# Altium PCB PCB2.FINAL.PcbDoc (part 2 of 2)
Units mm, origin at the board's own origin, x right, y up, seen from the top; angles counter-clockwise.
Board outline 120.4 x 83.82 mm, 2 copper layers (Top Layer, Bottom Layer); 48 components, 74 nets, 339 pads, 24 vias.
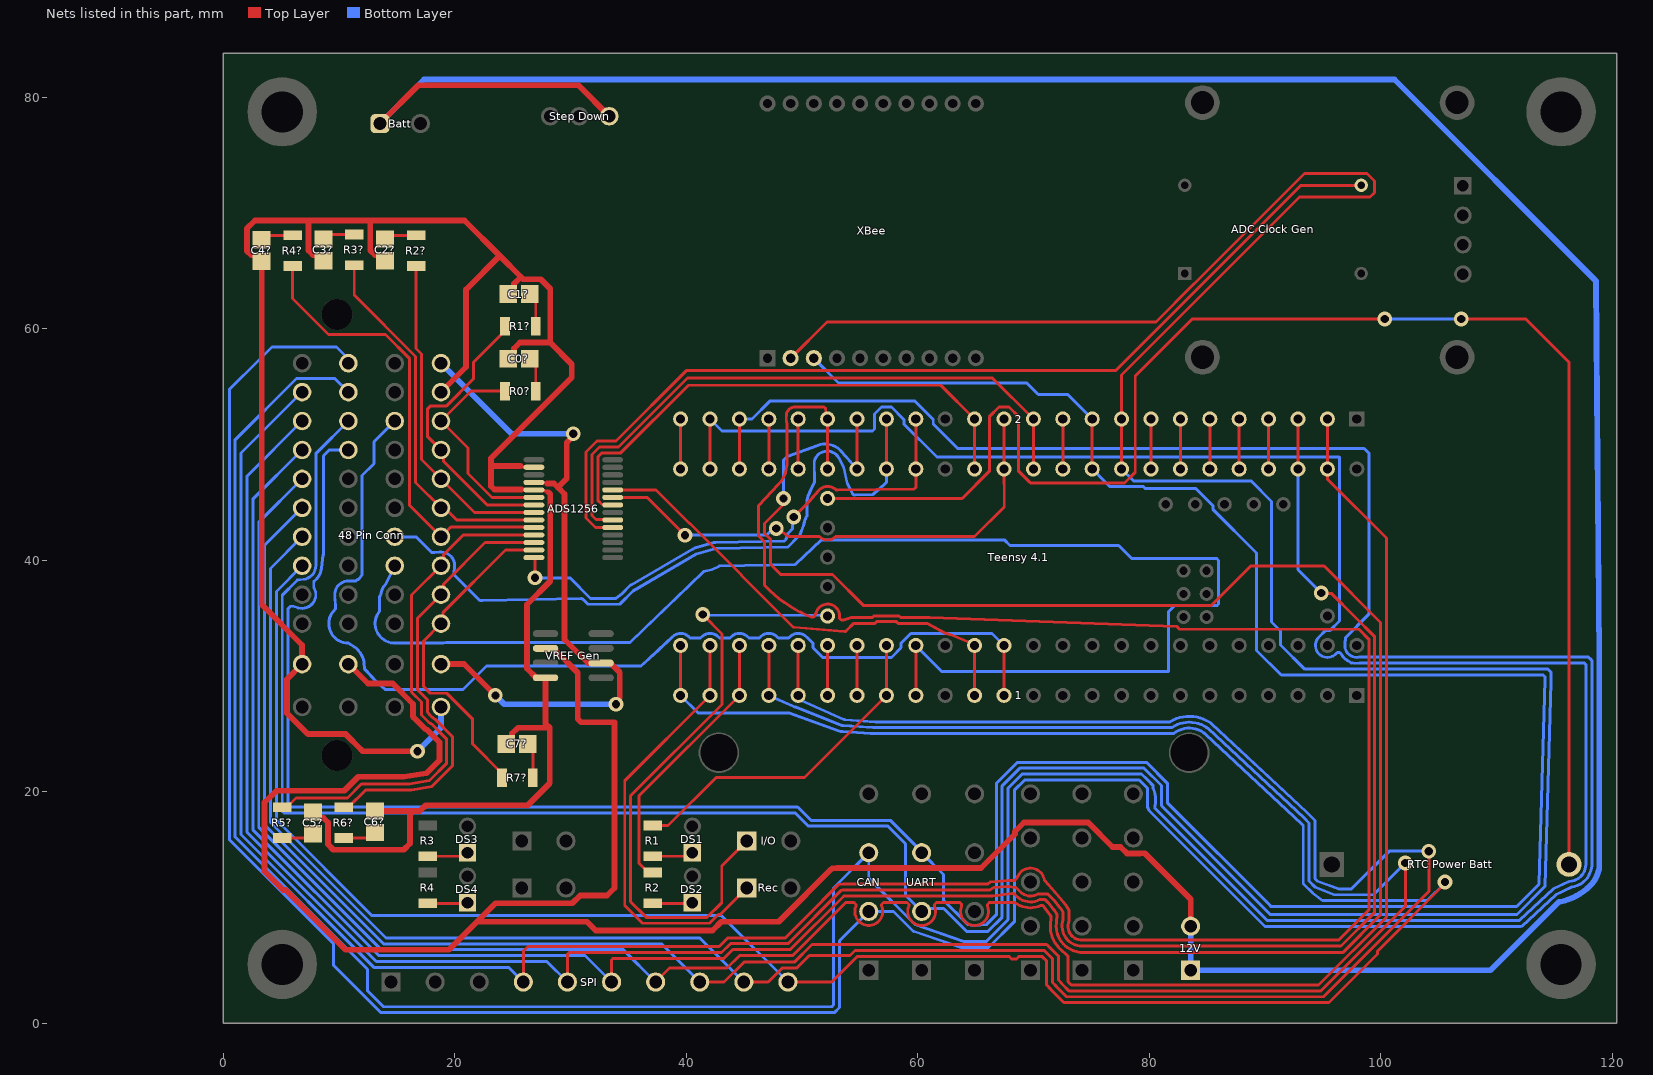
[diagram p2: the nets of this part, all layers, seen from the top]

## Via types
v1: diameter 1.27, hole 0.711, Top Layer to Bottom Layer, 24 vias

## Nets (pads, with @x,y where several pads share a name; then routed paths per layer and width w, separated by ;. In a path a pad name is that pad's centre, name@x,y a point inside that pad or via, vN(x,y) a via of type N, cw(c..) or ccw(c..) an arc to the next point about the centre after c; other vN are vias at no path point) (continued)
Net1_13: 1.13 "48 Pin Conn.C2" "Teensy 4.1.14" | length 91.6
  Top Layer w0.254: 1.13@67.437,28.321 67.437,32.639
  Bottom Layer w0.254: 9.615,37.023 ccw(c10.796,37.023) 9.619,36.925 9.692,36.042 9.692,35.848 9.475,35.575 ccw(c10.796,34.523) 10.803,32.834 11.302,32.513 cw(c10.313,30.975) 12.129,31.189 12.199,30.586 13.19,29.524 ccw(c14.796,31.023) 13.355,29.364 13.975,28.826 14.08,28.826 20.698,28.826 22.733,30.861 36.068,30.861 37.565,32.231 38.784,33.389 cw(c39.497,32.639) 40.271,33.326 40.323,33.274 41.211,33.274 41.263,33.326 cw(c42.037,32.639) 42.811,33.326 42.863,33.274 43.751,33.274 43.803,33.326 cw(c44.577,32.639) 45.351,33.326 45.403,33.274 46.291,33.274 46.343,33.326 cw(c47.117,32.639) 47.891,33.326 47.943,33.274 48.831,33.274 48.883,33.326 cw(c49.657,32.639) 50.389,33.371 50.927,32.833 50.927,32.445 51.768,31.604 57.706,31.604 58.547,32.445 58.547,32.833 59.388,33.674 66.402,33.674 67.437,32.639 ; 9.615,37.024 cw(c10.796,37.023) 10.799,38.204 11.434,38.204 11.509,38.278 11.618,38.326 11.663,38.345 11.697,38.379 11.713,38.395 11.977,38.77 11.977,47.312 13.004,48.338 13.004,50.231 14.796,52.023
Net1_14: 1.14 "Teensy 4.1.13" ADS1256.24 | length 41.4
  Top Layer w0.254: ADS1256.24@33.626,46.075 37.364,46.075 40.259,43.18 40.299,43.18 44.76,38.719 44.76,38.679 49.155,34.284 49.221,34.218 49.313,34.211 53.639,33.85 53.64,33.85 ccw(c53.66,34.103) 53.839,33.924 54.46,34.544 56.281,34.544 56.427,34.69 58.127,34.69 58.273,34.544 60.789,34.544 62.393,33.673 cw(c62.357,32.639) 62.745,33.598 64.748,32.788 64.897,32.639 1.14@64.897,28.321
Net1_16: 1.16 "48 Pin Conn.H2" "Teensy 4.1.41" | length 124
  Top Layer w0.254: 1.16@59.817,28.321 59.817,32.639
  Bottom Layer w0.254: 14.796,39.523 14.009,37.906 13.961,37.858 ccw(c14.796,37.023) 13.621,37.141 13.615,37.082 13.543,36.925 13.501,36.883 13.501,35.608 ccw(c14.796,34.523) 14.468,32.866 ccw(c14.796,34.523) 14.796,32.834 18.796,32.834 ccw(c18.796,34.523) 19.239,32.893 19.272,32.893 35.128,32.893 41.471,39.011 42.171,39.177 42.82,39.486 42.843,39.497 49.396,39.624 51.663,41.764 67.456,41.764 67.945,41.275 77.343,41.275 78.486,40.132 85.83,40.132 85.979,39.983 85.979,36.223 85.83,36.074 82.175,36.074 81.661,35.56 81.661,33.918 81.642,33.899 81.642,30.372 62.084,30.372 59.817,32.639
Net1_17: 1.17 "Teensy 4.1.40" R1.1 | length 29.2
  Top Layer w0.254: R1.1@37.084,17.073 38.409,17.073 42.573,21.237 50.193,21.237 1.17@57.277,28.321 57.277,32.639
Net1_18: 1.18 "Teensy 4.1.39" | length 4.3
  Top Layer w0.254: 1.18@54.737,28.321 54.737,32.639
Net1_19: 1.19 "Teensy 4.1.38" | length 4.3
  Top Layer w0.254: 1.19@52.197,28.321 52.197,32.639
Net1_20: 1.20 "48 Pin Conn.G4" "Teensy 4.1.37" SPI.9 | length 212.4
  Top Layer w0.254: SPI.9@44.958,3.556 47.062,3.556 48.268,4.762 49.53,4.762 50.614,5.846 54.12,5.846 54.56,6.286 70.916,6.286 71.628,5.574 71.628,3.512 71.946,3.194 71.946,3.168 72.828,2.286 95.04,2.286 104.14,11.386 v1(104.14,14.859) ; 1.20@49.657,28.321 49.657,32.639
  Bottom Layer w0.254: 6.796,42.023 4.064,39.291 4.064,17.348 14.046,7.366 41.148,7.366 SPI.9@44.958,3.556 ; 1.20@49.657,28.321 49.788,27.98 49.859,27.909 53.639,26.222 53.684,26.219 56.329,26.039 81.775,26.039 cw(c83.439,23.368) 84.945,26.131 85.292,25.943 85.418,25.827 93.561,18.252 94.305,17.508 94.305,12.486 94.528,12.263 96.374,11.607 97.459,11.607 100.711,14.859 v1(104.14,14.859)
Net1_21: 1.21 "48 Pin Conn.F4" "Teensy 4.1.36" SPI.8 | length 213.7
  Top Layer w0.254: SPI.8@41.148,3.556 43.252,3.556 44.966,5.27 49.32,5.27 50.844,6.794 71.127,6.794 72.136,5.785 72.136,3.723 72.454,3.405 72.454,3.379 73.039,2.794 94.829,2.794 102.108,10.073 v1(102.108,13.843) ; 1.21@47.117,28.321 47.117,32.639
  Bottom Layer w0.254: 6.796,44.523 3.556,41.283 3.556,17.138 13.836,6.858 37.846,6.858 SPI.8@41.148,3.556 ; 1.21@47.117,28.321 49.235,27.376 ccw(c49.657,28.321) 49.446,27.308 53.415,25.728 53.531,25.714 54.14,25.679 54.267,25.67 54.273,25.669 54.383,25.656 56.119,25.531 81.927,25.531 cw(c83.439,23.368) 84.927,25.547 85.092,25.435 93.35,17.744 93.797,17.298 93.797,12.275 94.317,11.755 95.97,11.099 99.364,11.099 v1(102.108,13.843)
Net1_22: 1.22 "Teensy 4.1.35" R2.1 | length 23.9
  Top Layer w0.254: R2.1@37.084,13.009 36.709,13.009 35.903,13.815 35.903,19.647 1.22@44.577,28.321 44.577,32.639
Net1_23: 1.23 "Teensy 4.1.34" Rec.1 | length 38
  Top Layer w0.254: 42.037,32.639 1.23@42.037,28.321 34.671,20.955 34.671,10.16 36.195,8.636 41.993,8.636 42.751,9.394 42.922,9.394 Rec.1@45.212,11.684
Net1_24: 1.24 "48 Pin Conn.H4" "Teensy 4.1.33" SPI.10 | length 219.1
  Top Layer w0.254: 1.24@39.497,28.321 39.497,32.639 ; SPI.10@48.768,3.556 52.548,3.556 54.77,5.778 67.862,5.778 68.09,5.549 68.511,5.549 68.74,5.778 70.706,5.778 71.12,5.364 71.12,3.302 71.438,2.984 71.438,2.958 72.554,1.842 72.58,1.842 72.644,1.778 95.504,1.778 99.693,5.967 99.693,6.221 105.537,12.065 v1(105.537,12.192)
  Bottom Layer w0.254: 6.796,39.523 4.572,37.299 4.572,17.558 12.844,9.286 43.038,9.286 SPI.10@48.768,3.556 ; 1.24@39.497,28.321 41.021,26.797 48.892,26.797 53.179,25.245 53.308,25.218 53.5,25.206 54.112,25.171 54.17,25.161 55.908,25.023 82.097,25.023 cw(c83.439,23.368) 84.892,24.927 93.14,17.236 93.289,17.087 93.289,12.065 93.363,11.99 94.107,11.247 94.975,10.591 104.009,10.591 105.537,12.119 v1(105.537,12.192)
Net2_2: 2.2 "48 Pin Conn.E4" "Teensy 4.1.0" SPI.7 | length 199.2
  Top Layer w0.254: SPI.7@37.338,3.556 38.544,4.762 43.508,4.762 44.6,5.854 49.185,5.854 53.745,10.414 54.489,10.414 54.564,10.34 54.638,10.265 54.638,10.16 54.638,10.112 ccw(c55.753,9.652) 56.868,10.112 56.868,10.16 56.868,10.265 56.942,10.34 57.017,10.414 59.061,10.414 59.136,10.34 59.21,10.265 59.21,10.16 59.21,10.112 ccw(c60.325,9.652) 61.44,10.112 61.44,10.16 61.44,10.265 61.514,10.34 61.589,10.414 63.633,10.414 63.708,10.34 63.782,10.265 63.782,10.16 63.782,10.112 ccw(c64.897,9.652) 66.012,10.112 66.012,10.16 66.012,10.265 66.086,10.34 66.161,10.414 68.39,10.414 ccw(c69.723,12.192) 70.627,10.162 70.679,10.162 70.784,10.162 70.859,10.088 70.872,10.075 71.478,9.266 71.478,9.076 71.444,8.564 ccw(c74.168,8.382) 72.351,6.344 72.818,5.928 72.962,5.784 72.962,3.589 73.249,3.302 94.619,3.302 100.476,9.159 100.476,41.911 95.394,46.993 95.394,47.862 95.377,47.879 2.2@95.377,52.197
  Bottom Layer w0.254: 6.796,47.023 3.048,43.275 3.048,16.927 13.625,6.35 34.544,6.35 SPI.7@37.338,3.556
Net2_3: 2.3 "48 Pin Conn.C4" "Teensy 4.1.1" SPI.5 | length 195.4
  Top Layer w0.254: SPI.5@29.718,3.556 29.718,5.963 29.867,6.112 43.039,6.112 43.797,6.87 48.765,6.87 53.38,11.485 53.477,11.491 53.756,11.507 56.395,11.508 56.655,11.51 66.232,11.51 66.516,11.712 67.698,11.824 67.815,11.824 68.399,11.739 68.483,11.727 68.869,11.34 ccw(c69.723,12.192) 70.376,11.178 70.51,11.178 cw(c70.511,10.67) 70.511,11.178 71.205,11.178 71.764,10.619 72.252,10.006 72.326,9.932 72.545,9.566 72.545,9.012 72.545,8.974 72.497,8.764 ccw(c74.168,8.382) 73.476,6.814 73.604,6.757 73.622,6.749 73.958,6.668 96.548,6.668 99.46,9.58 99.46,33.39 97.722,35.128 95.714,37.136 94.884,37.136 v1(94.847,37.173) ; 92.837,47.879 2.3@92.837,52.197
  Bottom Layer w0.254: 6.796,52.023 2.032,47.259 2.032,16.506 13.204,5.334 27.94,5.334 SPI.5@29.718,3.556 ; 92.837,47.879 92.837,39.183 v1(94.847,37.173)
Net2_4: 2.4 "Teensy 4.1.2" | length 4.3
  Top Layer w0.254: 90.297,47.879 2.4@90.297,52.197
Net2_5: 2.5 "Teensy 4.1.3" | length 4.3
  Top Layer w0.254: 87.757,47.879 2.5@87.757,52.197
Net2_6: 2.6 "Teensy 4.1.4" | length 4.3
  Top Layer w0.254: 85.217,47.879 2.6@85.217,52.197
Net2_7: 2.7 "Teensy 4.1.5" | length 4.3
  Top Layer w0.254: 82.677,47.879 2.7@82.677,52.197
Net2_8: 2.8 "Teensy 4.1.6" | length 4.3
  Top Layer w0.254: 80.137,47.879 2.8@80.137,52.197
Net2_9: 2.9 "48 Pin Conn.C3" "Teensy 4.1.7" UART.2 XBee.2 | length 336.9
  Top Layer w0.254: XBee.2@49.003,57.453 52.133,60.583 80.566,60.583 83.793,63.81 83.795,63.81 84.018,64.033 84.018,64.035 93.389,73.406 98.806,73.406 99.441,72.771 99.441,71.755 99.06,71.374 92.964,71.374 77.597,56.007 2.9@77.597,52.197 77.597,47.879
  Bottom Layer w0.254: 10.796,52.023 8.052,49.279 7.977,49.204 7.977,39.523 cw(c6.796,39.523) 6.957,38.353 6.376,38.273 6.301,38.199 5.08,36.977 5.08,18.31 5.229,18.161 49.403,18.161 50.546,17.018 57.404,17.018 58.928,15.494 58.928,11.049 UART.2@60.325,9.652 60.572,9.899 62.226,9.899 64.187,7.938 66.06,7.938 67.278,9.156 67.278,20.51 68.803,22.034 79.533,22.034 81.042,20.526 81.042,18.796 90.424,9.414 90.424,9.398 111.76,9.398 114.164,11.802 114.681,29.51 114.681,30.331 114.607,30.406 114.424,30.588 93.424,30.588 91.332,32.68 91.332,33.89 90.557,34.665 90.557,45.079 88.851,46.785 88.777,46.859 88.567,46.859 87.776,46.844 cw(c87.757,47.879) 87.757,46.844 85.217,46.844 cw(c85.217,47.879) 85.137,46.847 84.984,46.859 83.121,46.859 83.106,46.844 79.708,46.844 79.693,46.859 78.617,46.859 77.597,47.879
Net2_10: 2.10 "48 Pin Conn.D3" "Teensy 4.1.8" UART.3 XBee.3 | length 268.1
  Top Layer w0.254: 75.057,47.879 2.10@75.057,52.197
  Bottom Layer w0.254: 10.796,49.523 9.137,49.523 8.636,49.022 8.636,40.47 8.617,40.451 8.472,39.31 cw(c6.796,39.523) 7.962,38.301 7.803,38.142 7.803,37.64 cw(c6.796,37.023) 6.462,35.89 6.008,36.024 5.798,36.024 5.588,35.814 5.588,18.818 5.737,18.669 49.613,18.669 50.756,17.526 57.614,17.526 60.325,14.815 UART.3@60.325,14.732 62.219,12.838 62.219,10.624 64.26,8.583 64.334,8.509 64.741,8.456 ccw(c64.897,9.652) 64.975,8.449 65.913,8.509 65.987,8.583 66.77,9.366 66.77,20.72 68.592,22.542 79.744,22.542 81.55,20.736 81.55,19.05 90.474,10.126 90.474,10.083 111.726,10.083 113.507,11.864 113.656,12.012 114.173,29.721 114.173,29.931 114.099,30.006 114.024,30.08 91.392,30.08 89.262,32.21 89.262,40.626 85.477,44.411 85.477,44.727 84.002,46.202 79.632,46.202 79.483,46.351 76.585,46.351 75.057,47.879 ; XBee.3@51.003,57.453 53.148,55.308 69.402,55.308 70.401,54.31 72.944,54.31 2.10@75.057,52.197
Net2_11: 2.11 "Teensy 4.1.9" | length 4.3
  Top Layer w0.254: 72.517,47.879 2.11@72.517,52.197
Net2_12: 2.12 "Teensy 4.1.10" ADS1256.20 | length 53.9
  Top Layer w0.254: 31.837,47.502 31.837,43.855 32.18,43.512 33.588,43.512 ADS1256.20@33.626,43.475 ; 31.837,48.214 31.837,49.136 32.49,49.789 34.124,49.789 40.088,55.753 66.421,55.753 2.12@69.977,52.197 69.977,47.879 ; 31.837,47.502 31.837,48.214
Net2_13: 2.13 "Teensy 4.1.11" ADS1256.23 | length 44.5
  Top Layer w0.254: ADS1256.23@33.626,45.425 36.617,45.425 v1(39.878,42.164) ; v1(47.76,42.739) 48.573,42.232 48.768,42.037 51.497,42.037 ccw(c52.197,42.799) 52.897,42.037 64.897,42.037 67.459,44.599 67.459,46.556 67.437,46.578 67.437,47.879 2.13@67.437,52.197
  Bottom Layer w0.254: v1(39.878,42.164) 46.911,42.164 47.485,42.739 v1(47.76,42.739)
Net2_14: 2.14 "Teensy 4.1.12" ADS1256.22 | length 45.8
  Top Layer w0.254: 32.345,47.291 32.345,45.174 32.706,44.813 33.588,44.813 ADS1256.22@33.626,44.775 ; 32.345,48.424 32.345,48.926 32.7,49.281 34.335,49.281 40.172,55.118 61.976,55.118 2.14@64.897,52.197 64.897,47.879 ; 32.345,47.291 32.345,48.424
Net2_16: 2.16 "Teensy 4.1.24" ADS1256.14 | length 45.5
  Top Layer w0.254: ADS1256.14@26.826,40.225 26.833,40.225 26.924,40.134 v1(26.924,38.481) ; v1(49.263,43.731) 49.277,43.731 50.286,44.74 ccw(c50.107,44.919) 50.297,44.751 51.421,46.024 cw(c52.197,45.339) 52.951,46.048 53.054,46.048 ccw(c53.054,46.302) 53.056,46.048 59.67,46.143 59.743,46.216 59.817,46.29 59.817,47.879 2.16@59.817,52.197
  Bottom Layer w0.254: v1(26.924,38.481) 29.932,38.481 31.71,36.703 33.927,36.703 34.417,37.088 35.178,37.849 40.591,40.987 40.719,41.042 42.359,41.525 42.505,41.529 48.452,41.654 48.598,41.8 48.776,42.318 49.173,42.715 49.173,43.64 v1(49.263,43.731)
Net2_17: 2.17 "48 Pin Conn.G2" "Teensy 4.1.25" | length 65.9
  Top Layer w0.254: 57.277,47.879 2.17@57.277,52.197
  Bottom Layer w0.254: 14.796,42.023 16.647,42.023 18.021,40.649 18.231,40.649 18.667,40.697 cw(c18.796,39.523) 19.97,39.394 19.922,38.958 19.922,38.748 22.147,36.523 22.357,36.523 30.911,36.674 ; 30.912,36.674 cw(c30.915,36.42) 31.094,36.601 31.5,36.195 34.242,36.195 35.389,37.341 40.857,40.534 42.382,40.968 42.574,41.021 48.764,41.148 49.657,42.04 49.805,42.189 50.099,42.961 50.212,43.36 50.262,43.522 50.264,43.527 50.278,43.562 50.348,43.712 50.414,43.813 50.419,43.821 50.419,45.139 cw(c50.673,45.138) 50.426,45.197 cw(c55.784,43.883) 51.066,46.743 51.066,46.813 ccw(c50.812,46.813) 51.066,46.815 51.043,48.563 cw(c52.161,48.27) 51.055,48.603 cw(c52.161,48.27) 53.169,48.836 53.594,48.006 53.895,46.645 53.91,46.616 54.359,45.739 54.462,45.636 54.571,45.636 54.576,45.637 56.135,45.691 57.128,46.587 57.277,46.736 57.277,47.879 2.17@57.277,52.197
Net2_18: 2.18 "48 Pin Conn.D4" "Teensy 4.1.26" SPI.6 | length 250.9
  Top Layer w0.254: SPI.6@33.528,3.556 33.528,5.455 33.677,5.604 43.249,5.604 44.007,6.362 48.975,6.362 53.517,10.904 53.59,10.977 53.694,10.978 53.84,10.979 56.657,11.002 66.442,11.002 68.151,11.219 68.272,11.219 68.51,10.981 68.513,10.978 ccw(c69.723,12.192) 70.511,10.67 70.995,10.67 71.256,10.409 71.632,9.907 71.701,9.838 71.744,9.796 71.818,9.722 71.998,9.436 71.998,9.257 71.986,8.866 71.96,8.629 ccw(c74.168,8.382) 73.1,6.433 73.184,6.388 73.36,6.293 73.515,6.241 73.994,6.106 74.028,6.096 96.694,6.096 99.968,9.37 99.968,34.63 95.101,39.497 88.748,39.497 85.355,36.104 55.276,36.104 52.626,38.754 48.144,38.754 47.252,39.646 47.252,41.81 46.744,42.318 46.744,43.16 48.387,44.802 v1(48.387,45.339) ; 54.737,47.879 2.18@54.737,52.197
  Bottom Layer w0.254: 6.796,49.523 2.54,45.267 2.54,16.717 13.415,5.842 31.242,5.842 SPI.6@33.528,3.556 ; v1(48.387,45.339) 48.387,48.641 48.707,48.961 51.356,49.922 cw(c51.991,48.174) 53.382,49.408 54.737,47.879
Net2_19: 2.19 "48 Pin Conn.B4" "Teensy 4.1.27" SPI.4 | length 257.2
  Top Layer w0.254: SPI.4@25.908,3.556 25.908,6.223 26.305,6.62 42.828,6.62 43.586,7.378 48.554,7.378 51.736,10.56 51.736,10.588 53.031,11.883 53.107,11.936 53.17,11.993 53.533,12.015 53.553,12.016 56.653,12.018 66.021,12.018 66.286,12.2 67.816,12.345 68.321,12.345 68.378,12.345 68.527,12.494 68.642,12.727 cw(c69.723,12.192) 70.863,12.585 70.953,12.327 72.272,10.829 72.771,10.214 72.778,10.207 73.053,9.759 73.053,9.012 cw(c72.545,9.012) 73.053,9.01 73.053,8.933 73.053,8.842 ccw(c74.168,8.382) 73.871,7.213 ccw(c74.168,8.382) 73.879,7.211 73.895,7.207 ccw(c74.168,8.382) 74.168,7.176 96.337,7.176 98.952,9.791 98.952,33.18 98.103,34.029 97.966,34.035 ccw(c97.917,33.001) 97.917,34.036 82.607,34.036 82.533,34.11 82.353,34.29 61,35.052 58.483,35.052 58.337,35.198 56.217,35.198 56.071,35.052 54.249,35.052 53.591,34.831 53.38,34.831 53.231,34.98 53.231,34.982 53.232,35.171 ccw(c52.197,35.179) 51.234,35.558 51.106,35.234 cw(c50.87,35.327) 50.87,35.073 50.821,35.073 cw(c54.943,45.531) 46.813,37.768 cw(c46.998,37.942) 46.744,37.94 46.744,37.942 46.744,41.6 46.236,42.108 46.236,44.734 47.928,46.531 ccw(c46.115,48.344) 48.616,47.78 48.623,47.926 cw(c49.657,47.879) 48.646,48.102 48.677,48.243 ccw(c46.115,48.344) 48.679,48.344 48.679,51.817 48.644,51.983 cw(c49.657,52.197) 48.624,52.254 48.639,52.542 cw(c49.38,52.501) 49.376,53.243 ; 49.377,53.243 51.888,53.243 52.037,53.094 52.037,52.357 2.19@52.197,52.197 52.197,47.879
  Bottom Layer w0.254: 6.796,54.523 1.524,49.251 1.524,16.296 12.994,4.826 24.638,4.826 SPI.4@25.908,3.556
Net2_20: 2.20 "Teensy 4.1.28" | length 4.3
  Top Layer w0.254: 49.657,47.879 2.20@49.657,52.197
Net2_21: 2.21 "Teensy 4.1.29" | length 4.3
  Top Layer w0.254: 47.117,47.879 2.21@47.117,52.197
Net2_24: 2.24 "Teensy 4.1.32" | length 4.3
  Top Layer w0.254: 39.497,47.879 2.24@39.497,52.197
Net12V_1: 12V.1 12V.2 "48 Pin Conn.L3" "Step Down.1" "VREF Gen.2" Batt.1 | length 395.7
  Top Layer w0.5: 10.796,31.023 12.481,29.338 14.625,29.338 16.383,27.58 16.383,26.496 16.476,26.362 17.45,25.388 17.603,25.333 18.657,24.279 18.657,22.711 17.548,21.602 15.586,21.294 11.65,21.294 10.445,20.089 4.579,20.089 3.556,19.066 3.556,13.131 5.169,11.519 5.372,11.519 10.541,6.35 19.494,6.35 21.907,8.763 ; Batt.1@13.518,77.724 16.82,81.026 30.667,81.026 33.334,78.359 ; 28.645,32.233 30.607,30.271 30.607,26.289 30.9,25.996 33.782,25.996 33.782,11.684 33.139,11.041 30.827,11.041 30.141,10.355 23.5,10.355 22.434,9.29 22.188,9.043 21.907,8.763 ; 12V.2@83.566,8.382 83.566,10.713 79.592,14.687 79.178,14.687 79.163,14.673 78.063,14.673 77.504,15.232 76.817,15.232 74.718,17.331 69.173,17.331 68.394,16.552 68.394,16.35 65.447,13.403 53.026,13.403 52.753,13.378 52.617,13.363 52.594,13.36 52.446,13.257 50.351,11.162 50.351,11.134 47.98,8.763 43.013,8.763 42.255,8.005 32.166,8.005 31.408,8.763 21.907,8.763
  Bottom Layer w0.5: Batt.1@13.518,77.724 17.329,81.535 101.175,81.535 118.432,64.278 118.578,64.132 118.868,31.438 118.868,13.331 118.683,12.827 cw(c116.248,13.716) 118.081,11.883 cw(c114.486,15.478) 115.517,10.499 cw(c114.486,15.478) 115.374,10.472 109.474,4.572 12V.1@83.566,4.572 12V.2@83.566,8.382
"Net48 Pin Conn_A1": "48 Pin Conn.A1" "48 Pin Conn.L1" "VREF Gen.6" ADS1256.4 | length 60.1
  Top Layer w0.254: ADS1256.4@26.826,46.725 26.864,46.687 27.918,46.687 27.984,46.621 ; 31.496,31.115 32.626,31.115
  Top Layer w0.5: 18.796,31.023 20.793,31.023 v1(23.495,28.321) ; 27.984,46.621 28.568,46.621 28.895,46.294 ; v1(30.226,50.927) 30.226,50.719 29.669,50.161 29.669,47.068 28.895,46.294 ; 31.496,31.115 29.464,33.147 29.464,45.725 28.895,46.294 ; 32.626,31.115 33.426,31.115 34.23,30.311 34.23,28.088 33.909,27.767 v1(33.909,27.559)
  Bottom Layer w0.5: 18.796,57.023 24.892,50.927 v1(30.226,50.927) ; v1(23.495,28.321) 24.257,27.559 v1(33.909,27.559)
"Net48 Pin Conn_A3": 2.22 "48 Pin Conn.A3" "Teensy 4.1.30" CAN.2 | length 324.2
  Top Layer w0.254: 44.577,47.879 2.22@44.577,52.197
  Bottom Layer w0.254: 10.796,57.023 10.796,57.387 9.765,58.418 6.953,58.418 4.189,58.418 3.078,57.307 0.508,54.737 0.508,15.875 9.525,6.858 9.525,4.997 13.611,0.911 52.771,0.911 53.217,1.357 53.217,7.116 CAN.2@55.753,9.652 57.901,9.652 59.541,8.012 59.615,7.938 63.747,6.545 63.828,6.532 66.091,6.532 68.326,8.767 68.326,20.121 69.223,21.018 79.113,21.018 79.819,20.312 79.819,18.693 79.822,18.69 cw(c79.642,18.51) 79.882,18.594 79.955,18.387 89.992,8.349 112.065,8.349 112.181,8.382 115.112,11.103 116.486,11.769 ccw(c116.248,13.716) 118.153,13.25 118.237,13.592 118.237,31.325 118.163,31.4 117.939,31.623 98.114,31.623 cw(c97.917,32.639) 96.889,32.761 ; 2.22@44.577,52.197 45.653,52.197 47.196,53.74 59.738,53.74 61.322,52.156 61.322,51.768 63.433,49.657 98.552,49.657 98.952,49.257 98.952,35.322 96.956,33.326 96.889,32.762
"Net48 Pin Conn_B1": "48 Pin Conn.B1" "48 Pin Conn.L4" "48 Pin Conn.M1" "VREF Gen.4" ADS1256.2 ADS1256.5 C0?.1 C1?.1 C2?.1 C3?.1 C4?.1 C5?.1 C6?.1 C7?.1 | length 211.2
  Top Layer w0.254: 25.654,48.133 25.724,48.063 26.789,48.063 ADS1256.2@26.826,48.025 ; 25.781,46.101 26.8,46.101 26.864,46.037 27.675,46.037 27.723,45.99 27.958,45.99 28.081,45.867
  Top Layer w0.5: C5?.1@7.747,18.233 8.247,17.733 8.635,17.733 9.026,17.342 9.026,15.452 9.492,14.986 15.582,14.986 16.113,15.517 16.113,18.018 16.419,18.324 ; C3?.1@8.636,65.877 8.136,66.377 7.748,66.377 7.357,66.768 7.357,69.224 7.239,69.342 ; C6?.1@13.081,18.324 16.419,18.324 ; C2?.1@13.97,65.877 13.47,66.377 13.082,66.377 12.691,66.768 12.691,69.333 12.7,69.342 ; v1(16.764,23.495) 12.041,23.495 11.894,23.641 10.562,24.973 7.302,24.973 5.492,26.783 5.492,29.719 6.796,31.023 6.796,32.679 3.302,36.173 C4?.1@3.302,65.841 2.802,66.341 2.414,66.341 2.023,66.732 2.023,68.65 2.715,69.342 7.239,69.342 ; 18.796,54.523 20.958,56.685 20.958,63.376 23.879,66.297 ; C7?.1@24.439,24.13 24.939,24.63 24.939,25.018 25.448,25.527 28.194,25.527 ; C0?.1@24.602,57.404 25.102,57.904 25.102,58.292 25.611,58.801 28.23,58.801 ; C1?.1@24.602,62.992 25.102,63.492 25.102,63.88 25.699,64.477 ; 25.654,48.133 23.114,48.133 ; 25.763,46.083 25.744,46.101 23.407,46.101 23.114,46.394 23.114,48.133 ; 28.081,45.867 28.09,45.867 28.23,45.727 28.23,38.176 26.222,36.168 26.222,30.649 27.026,29.845 27.826,29.845 27.826,25.895 28.194,25.527 ; 7.239,69.342 12.7,69.342 ; 12.7,69.342 20.834,69.342 23.879,66.297 ; 16.419,18.324 16.966,18.324 17.478,18.836 26.289,18.836 28.194,20.74 28.194,25.527 ; 23.114,48.133 23.114,48.807 30.099,55.792 30.099,56.932 28.23,58.801 ; 23.879,66.297 25.699,64.477 ; 25.699,64.477 25.905,64.271 27.411,64.271 28.23,63.452 28.23,58.801
  Bottom Layer w0.5: v1(16.764,23.495) 18.796,25.527 18.796,27.323
"Net48 Pin Conn_B3": 2.23 "48 Pin Conn.B3" "Teensy 4.1.31" CAN.3 | length 329
  Top Layer w0.254: 42.037,47.879 2.23@42.037,52.197
  Bottom Layer w0.254: 10.796,54.523 9.615,55.704 6.307,55.704 1.016,50.413 1.016,16.085 12.446,4.655 12.446,2.794 13.821,1.419 52.56,1.419 52.709,1.568 52.709,11.688 CAN.3@55.753,14.732 55.753,12.518 59.751,8.52 63.956,7.054 64.04,7.04 65.881,7.04 67.786,8.946 67.786,20.299 69.013,21.526 79.323,21.526 79.825,21.024 80.327,20.522 80.327,20.292 cw(c78.114,19.313) 80.47,18.76 cw(c78.114,19.313) 80.463,18.732 80.463,18.597 90.203,8.857 90.413,8.857 111.888,8.89 111.97,8.89 114.902,11.611 116.292,12.263 ccw(c116.248,13.716) 117.701,13.714 117.729,30.756 117.729,30.966 117.655,31.041 117.58,31.115 98.158,31.115 cw(c97.917,32.639) 97.813,31.1 97.583,31.115 97.436,31.138 97.154,31.298 cw(c97.917,32.639) 97.126,31.314 97.09,31.336 97.056,31.358 cw(c97.917,32.639) 96.561,31.903 ccw(c96.338,31.78) 96.15,31.951 cw(c95.377,32.639) 94.645,33.371 95.183,33.909 95.571,33.909 96.412,34.75 96.412,48.895 96.393,48.914 61.636,48.914 58.782,51.768 58.782,52.156 57.706,53.232 56.848,53.232 56.242,52.626 56.242,51.33 56.074,51.162 43.072,51.162 2.23@42.037,52.197
"Net48 Pin Conn_C1": "48 Pin Conn.C1" ADS1256.6 R0?.1 | length 18.7
  Top Layer w0.254: R0?.1@24.329,54.61 21.383,54.61 18.796,52.023 21.122,49.697 21.122,47.493 23.191,45.425 ADS1256.6@26.826,45.425
"Net48 Pin Conn_D1": "48 Pin Conn.D1" ADS1256.7 R1?.1 | length 25.2
  Top Layer w0.254: R1?.1@24.329,60.198 24.329,59.823 21.589,57.083 21.589,55.646 19.285,53.342 17.909,53.342 17.615,53.048 17.615,50.704 19,49.319 19,48.564 22.789,44.775 ADS1256.7@26.826,44.775
"Net48 Pin Conn_E1": "48 Pin Conn.E1" ADS1256.8 R2?.1 | length 28.5
  Top Layer w0.254: R2?.1@16.637,65.422 16.637,58.289 17.107,57.819 17.107,48.712 18.796,47.023 21.694,44.125 ADS1256.8@26.826,44.125
"Net48 Pin Conn_F1": "48 Pin Conn.F1" ADS1256.9 R3?.1 | length 32.5
  Top Layer w0.254: R3?.1@11.303,65.477 11.303,62.905 16.599,57.609 16.599,46.72 18.796,44.523 19.104,44.523 20.152,43.475 ADS1256.9@26.826,43.475
"Net48 Pin Conn_G1": "48 Pin Conn.G1" ADS1256.10 R4?.1 | length 40
  Top Layer w0.254: R4?.1@5.969,65.422 5.969,62.607 9.081,59.496 13.994,59.496 16.091,57.398 16.091,44.728 18.796,42.023 19.642,42.869 25.968,42.869 25.975,42.863 26.789,42.863 ADS1256.10@26.826,42.825
"Net48 Pin Conn_H1": "48 Pin Conn.H1" ADS1256.11 R5?.1 | length 44.7
  Top Layer w0.254: R5?.1@5.08,18.652 5.455,18.652 6.261,19.458 10.706,19.458 11.911,20.663 15.949,20.663 16.054,20.663 17.809,20.971 19.288,22.45 19.288,24.54 17.99,25.839 cw(c18.796,27.323) 17.839,25.931 17.711,26.019 17.107,26.623 17.107,27.749 16.256,28.6 16.256,36.983 19.009,39.736 19.009,40.472 20.712,42.175 ADS1256.11@26.826,42.175
"Net48 Pin Conn_J1": "48 Pin Conn.J1" ADS1256.12 R6?.1 | length 38
  Top Layer w0.254: R6?.1@10.414,18.652 10.789,18.652 12.292,20.155 16.264,20.155 18.02,20.463 19.796,22.239 19.796,24.751 18.292,26.255 cw(c18.796,27.323) 17.841,26.628 17.615,26.939 17.615,27.959 16.764,28.81 16.764,34.991 19.029,37.256 19.029,37.952 22.602,41.525 ADS1256.12@26.826,41.525
"Net48 Pin Conn_K1": "48 Pin Conn.K1" ADS1256.13 R7?.1 | length 28.7
  Top Layer w0.254: R7?.1@24.075,21.209 24.075,21.584 21.531,24.128 21.531,26.258 19.285,28.504 17.871,28.504 17.272,29.103 17.272,32.999 18.796,34.523 18.986,34.713 18.986,35.496 24.365,40.875 ADS1256.13@26.826,40.875
"NetADC Clock Generator_8": "ADC Clock Gen.8" ADS1256.19 | length 84.9
  Top Layer w0.254: 31.329,47.712 31.329,43.645 32.149,42.825 ADS1256.19@33.626,42.825 ; 31.329,48.003 31.329,49.347 32.279,50.297 33.914,50.297 39.989,56.372 77.073,56.372 84.003,63.302 84.005,63.302 84.526,63.823 84.526,63.825 93.091,72.39 98.298,72.39 ; 31.329,47.712 31.329,48.003
NetC0?_2: C0?.2 R0?.2 | length 3
  Top Layer w0.254: C0?.2@26.452,57.404 26.979,56.877 R0?.2@26.979,54.61
NetC1?_2: C1?.2 R1?.2 | length 3
  Top Layer w0.254: C1?.2@26.452,62.992 26.979,62.465 R1?.2@26.979,60.198
NetC2?_2: C2?.2 R2?.2 | length 2.8
  Top Layer w0.254: C2?.2@13.97,67.727 14.315,68.072 R2?.2@16.637,68.072
NetC3?_2: C3?.2 R3?.2 | length 2.8
  Top Layer w0.254: C3?.2@8.636,67.727 9.036,68.127 R3?.2@11.303,68.127
NetC4?_2: C4?.2 R4?.2 | length 2.8
  Top Layer w0.254: C4?.2@3.302,67.691 3.683,68.072 R4?.2@5.969,68.072
NetC5?_2: C5?.2 R5?.2 | length 2.8
  Top Layer w0.254: R5?.2@5.08,16.002 7.366,16.002 C5?.2@7.747,16.383
NetC6?_2: C6?.2 R6?.2 | length 2.9
  Top Layer w0.254: R6?.2@10.414,16.002 12.609,16.002 C6?.2@13.081,16.474
NetC7?_2: C7?.2 R7?.2 | length 3.1
  Top Layer w0.254: C7?.2@26.289,24.13 26.725,23.694 R7?.2@26.725,21.209
NetDS1_1: DS1.1 R1.2 | length 3.5
  Top Layer w0.254: R1.2@37.084,14.423 40.328,14.423 DS1.1@40.513,14.608
NetDS2_1: DS2.1 R2.2 | length 3.5
  Top Layer w0.254: R2.2@37.084,10.359 DS2.1@40.328,10.359 ; DS2.1@40.328,10.486 DS2.1@40.513,10.671
NetDS3_1: DS3.1 R3.2 | length 3.5
  Top Layer w0.254: R3.2@17.653,14.423 20.897,14.423 DS3.1@21.082,14.608
NetDS4_1: DS4.1 R4.2 | length 3.5
  Top Layer w0.254: R4.2@17.653,10.359 20.897,10.359 DS4.1@21.082,10.544
NetI/O_1: "Teensy 4.1.ON/OFF" I/O.1 | length 54.8
  Top Layer w0.254: v1(41.402,35.306) 43.072,33.636 43.072,27.534 35.179,19.641 35.179,10.5 36.535,9.144 41.783,9.144 43.053,10.414 43.053,13.589 I/O.1@45.212,15.748
  Bottom Layer w0.254: v1(41.402,35.306) 41.465,35.242 52.133,35.242 52.197,35.179
"NetRTC power batt_2": "RTC Power Batt.2" "Teensy 4.1.VBAT" | length 131.2
  Top Layer w0.254: 52.197,45.339 63.821,45.339 66.167,47.685 66.167,52.391 67.008,53.232 67.866,53.232 68.707,52.391 68.707,47.685 69.659,46.733 69.733,46.659 77.841,46.659 78.775,47.593 78.775,55.915 83.693,60.833 v1(100.33,60.833) ; v1(106.934,60.833) 112.522,60.833 116.248,57.107 116.248,13.716
  Bottom Layer w0.254: v1(100.33,60.833) v1(106.934,60.833)
"NetTeensy 4.1_46": 
"NetTeensy 4.1_50": 
"NetTeensy 4.1_51": 
pads on no net: 3.1 4.1 "48 Pin Conn.J3" "48 Pin Conn.J4" "48 Pin Conn.K3" "48 Pin Conn.K4" "48 Pin Conn.MOUNT1" "48 Pin Conn.MOUNT2" "ADC Clock Gen.1" "Teensy 4.1.3.3V_3" "Teensy 4.1.5V" "Teensy 4.1.D+" "Teensy 4.1.D-" "Teensy 4.1.GND5" "Teensy 4.1.LED" "Teensy 4.1.PROGRAM" "Teensy 4.1.R+" "Teensy 4.1.R-" "Teensy 4.1.T+" "Teensy 4.1.T-" "Teensy 4.1.USB_GND1" "Teensy 4.1.USB_GND2" "Teensy 4.1.VUSB" "VREF Gen.1" "VREF Gen.3" "VREF Gen.5" "VREF Gen.7" "VREF Gen.8" ADS1256.18 ADS1256.25 ADS1256.26 ADS1256.27 ADS1256.28 Display.S1 Display.S2 Display.S3 Display.S4 R3.1 R4.1 XBee.4 XBee.5 XBee.6 XBee.7 XBee.8 XBee.9 XBee.11 XBee.12 XBee.13 XBee.14 XBee.15 XBee.16 XBee.17 XBee.18 XBee.19 XBee.20

## Silkscreen, mask and mechanical layers (free items; w line width, h text height)
Top Overlay:
  drawing of 56 lines, arcs and shapes, not listed
  text "GTOR DAQ 2025 - 2026" at 114.3,73.914 h1.3 r270
  text "Designed by Kyle Jiang and Andrew Rissler" at 116.713,73.914 h1.3 r270
  text "tonight we steal the moon" at 105.31,37.967 h0.51 r270
Mechanical 1:
  the board outline again, w0.254

## Text inside footprints (layer, text, board x,y; h text height)
"48 Pin Conn": Mechanical 13 "RefDes2" at 12.161,44.395 h1.27 r270